# EAGLE board #2 v6 (EAGLE 9.7.0)
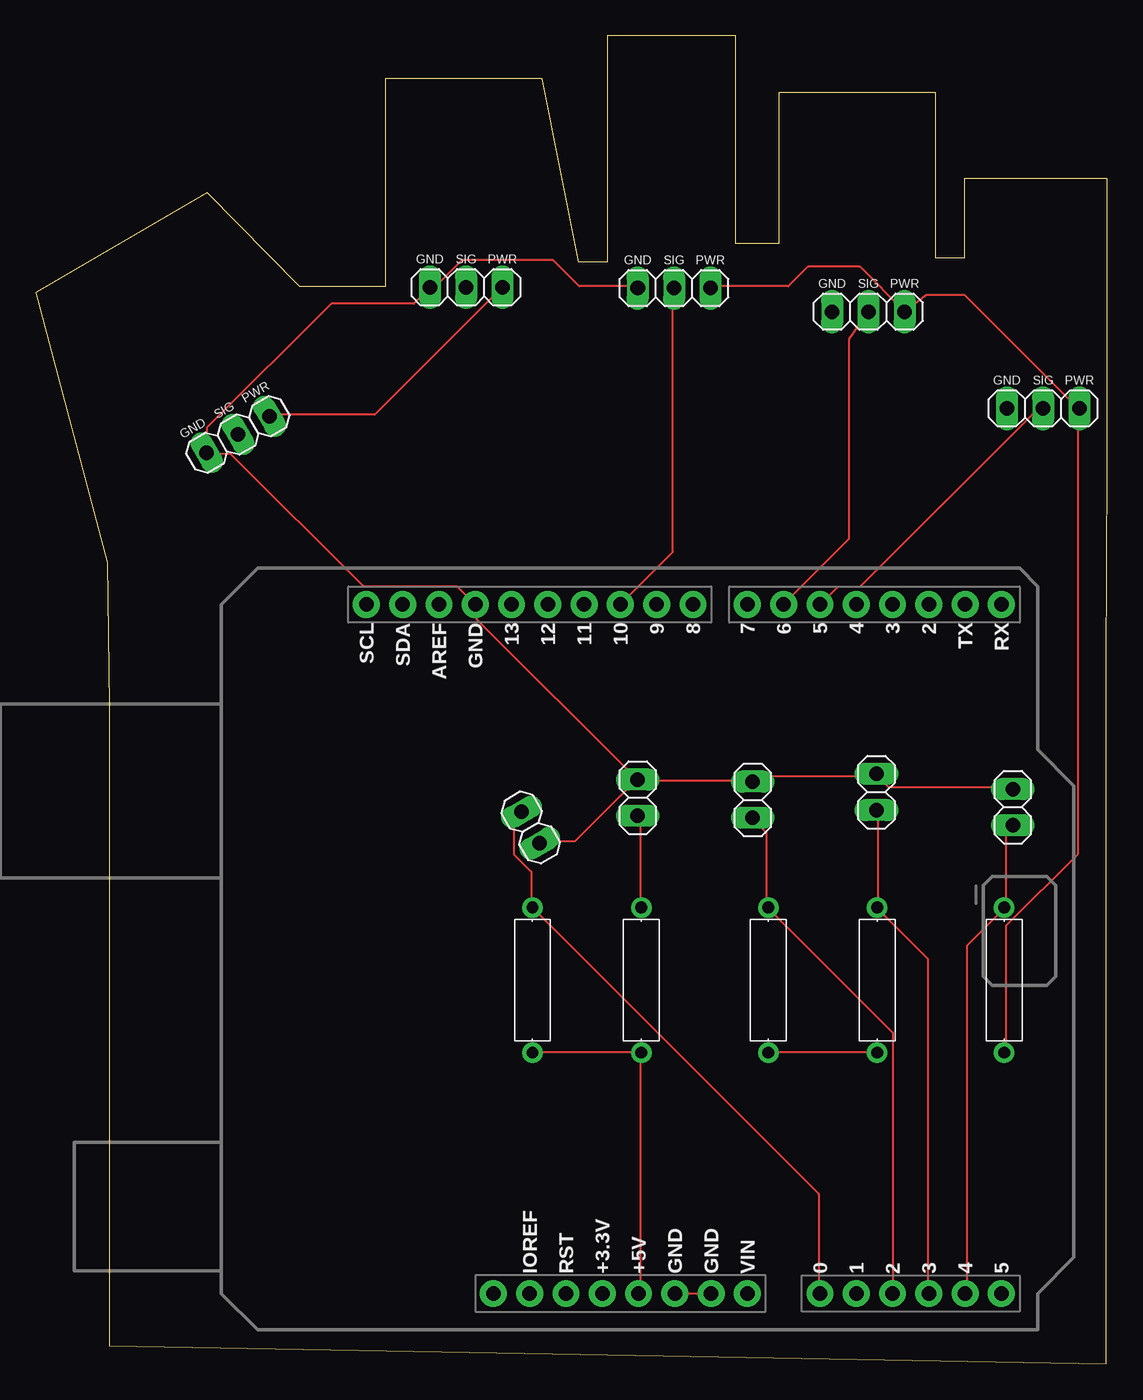
[diagram p0: board, top side]
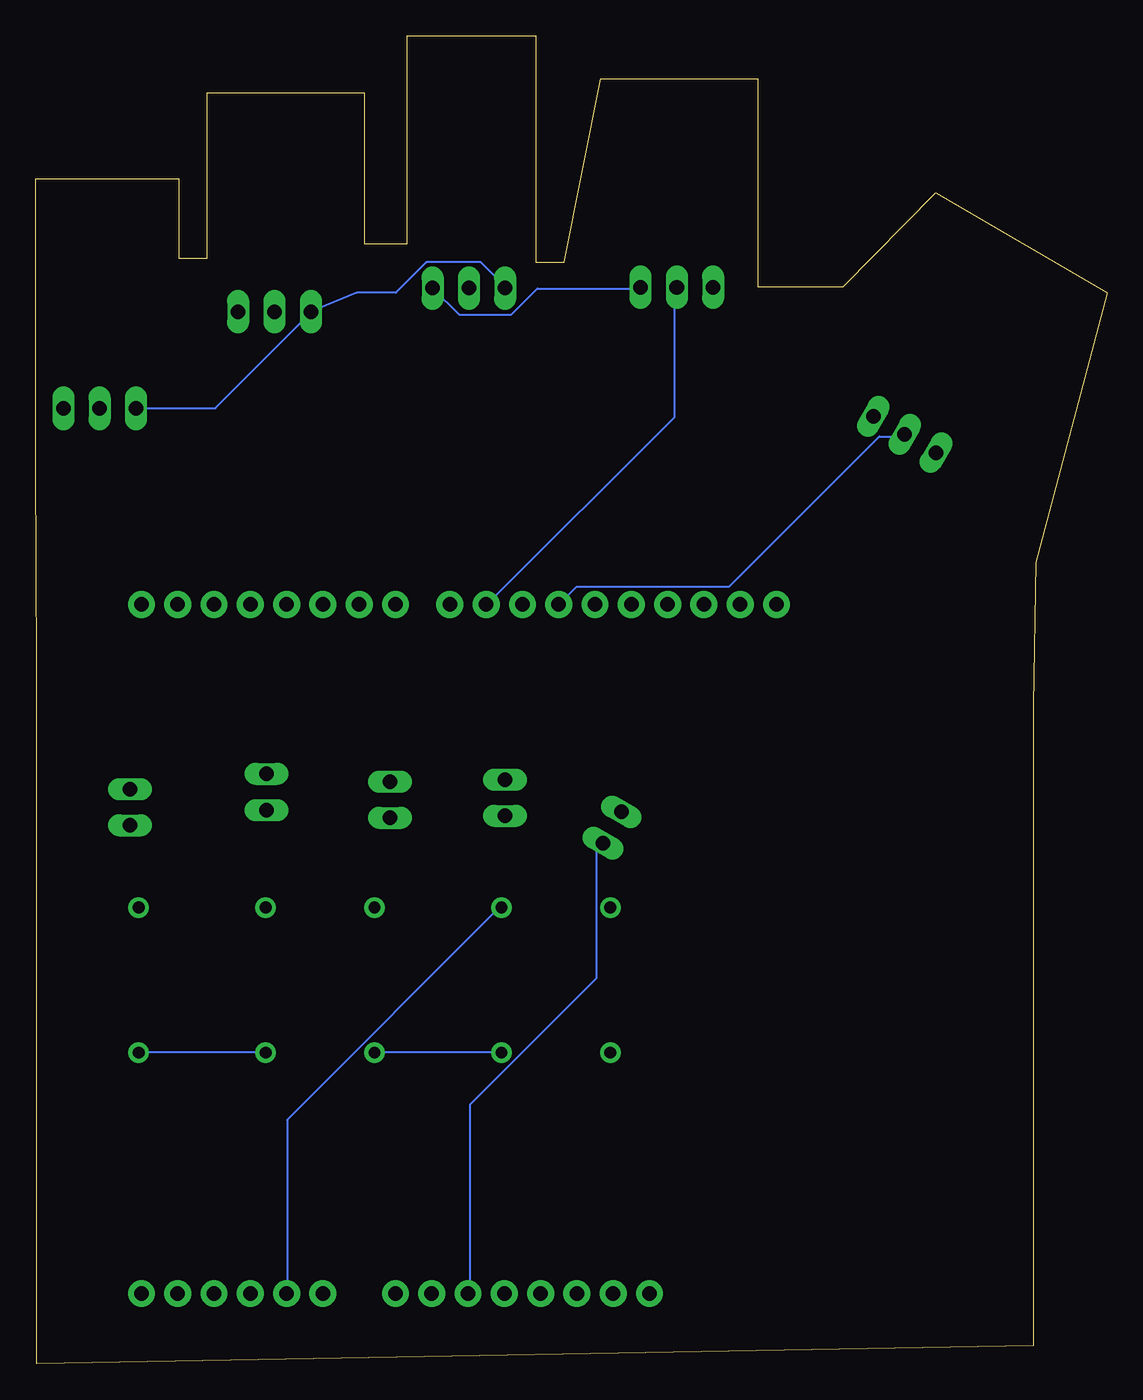
[diagram p1: board, bottom side, seen from below]

Size 75 x 93 mm. Coordinates in mm from the lower left corner, seen from the top.
Outline: 5.16,46.11 5.16,1.27 74.92,0 74.92,48.73 75,63 75,83 65,83 65,77.43 63,77.43 63,89 52,89 52,78.43 49,78.43 49,93 40,93 40,77.16 38,77.16 35.46,90 24.46,90 24.46,75.44 18.48,75.44 12,82 0,75 5,56.11 5.16,46.11
Copper layers (1*16): Top 0.035mm / dielectric 1.5mm / Bottom 0.035mm
Design rules "default": minimum track width 6mil, minimum drill 0.35mm, track to track 6mil, track to pad 6mil, pad to pad 6mil, via to via 6mil, smd to smd 6mil, copper to edge 40mil, drill to drill 6mil, minimum pad ring 10mil, minimum via ring 8mil, stop-mask expansion 4mil, vias tented up to drill 0mil, thermal gap 10mil

## Footprints (pad centres in the part's own frame; a part is rotated, then mirrored left to right if it is on the bottom)
1X02 = drill 1.016 long: 1 -1.27,0; 2 1.27,0
RESAD1016W63L850D250B = drill 0.83 pad 1.43: 1 -5.08,0; 2 5.08,0
SM-S2309S = drill 1.016 long: 1 -2.54,0; 2 0,0; 3 2.54,0
ARDUINO-UNO-R3-SHIELD = drill 1.016 pad 1.88: 3.3V 24.13,-2.54; 5V 24.13,0; A0 24.13,12.7; A1 24.13,15.24; A2 24.13,17.78; A3 24.13,20.32; A4 24.13,22.86; A5 24.13,25.4; AREF -24.13,-13.97; D2 -24.13,20.32; D3 -24.13,17.78; D4 -24.13,15.24; D5 -24.13,12.7; D6 -24.13,10.16; D7 -24.13,7.62; D8 -24.13,3.81; D9 -24.13,1.27; D10 -24.13,-1.27; D11 -24.13,-3.81; D12 -24.13,-6.35; D13 -24.13,-8.89; GND@0 24.13,2.54; GND@1 24.13,5.08; GND@2 -24.13,-11.43; IOREF 24.13,-7.62; NC 24.13,-10.16; RES 24.13,-5.08; RX -24.13,25.4; SCL -24.13,-19.05; SDA -24.13,-16.51; TX -24.13,22.86; VIN 24.13,7.62

## Placement (x,y rotation side)
R1  FLEX-SENSOR  [1X02]  42.14,39.65 90 top
R2  FLEX-SENSOR  [1X02]  50.19,39.49 90 top
R3  FLEX-SENSOR  [1X02]  58.85,40.04 90 top
R4  FLEX-SENSOR  [1X02]  68.4,38.98 90 top
R5  FLEX-SENSOR  [1X02]  34.64,37.54 300 top
R6  10k  [RESAD1016W63L850D250B]  34.77,26.87 90 top
R7  10k  [RESAD1016W63L850D250B]  42.39,26.87 90 top
R8  10k  [RESAD1016W63L850D250B]  51.28,26.87 90 top
R9  10k  [RESAD1016W63L850D250B]  58.9,26.87 90 top
R10  10k  [RESAD1016W63L850D250B]  67.79,26.87 90 top
SERVO1  SERVOSM-S2309S  [SM-S2309S]  70.52,66.9 180 top
SERVO2  SERVOSM-S2309S  [SM-S2309S]  58.29,73.67 180 top
SERVO3  SERVOSM-S2309S  [SM-S2309S]  30.13,75.38 180 top
SERVO4  SERVOSM-S2309S  [SM-S2309S]  44.68,75.32 180 top
SERVO5  SERVOSM-S2309S  [SM-S2309S]  14.17,65.08 210 top
U1  ARDUINO-UNO-R3-SHIELD  [ARDUINO-UNO-R3-SHIELD]  42.2,29.05 270 top

## Library data of the parts
R1-R10 SERVO1-SERVO5 U1 = Tinkercad

## Nets
U1_5V: R6.1 R7.1 R8.1 R9.1 R10.1 SERVO1.1 SERVO2.1 SERVO3.1 SERVO4.1 SERVO5.1 U1.5V
U1_A0: R5.1 R6.2 U1.A0
U1_A1: R1.1 R7.2 U1.A1
U1_A2: R2.1 R8.2 U1.A2
U1_A3: R3.1 R9.2 U1.A3
U1_A4: R4.1 R10.2 U1.A4
U1_D5: SERVO1.2 U1.D5
U1_D6: SERVO2.2 U1.D6
U1_D9: SERVO3.2 U1.D9
U1_D10: SERVO4.2 U1.D10
U1_D11: SERVO5.2 U1.D11
U1_GND: R1.2 R2.2 R3.2 R4.2 R5.2 SERVO1.3 SERVO2.3 SERVO3.3 SERVO4.3 SERVO5.3 U1.GND@0 U1.GND@1 U1.GND@2

## Tracks (layer width: path | path; a pad name or v marks a point on that pad's centre or on a via)
U1_5V
  Top 0.152: R8.1 51.31,21.81 58.77,21.81 R9.1 | R6.1 34.85,21.81 42.31,21.81 R7.1 42.31,21.65 42.31,5.04 U1.5V | SERVO5.1 16.41,66.46 23.72,66.46 32.56,75.3 SERVO3.1 | SERVO4.1 47.34,75.45 52.68,75.45 54.05,76.82 57.71,76.82 60.81,73.72 SERVO2.1 62.34,74.84 65.02,74.84 72.95,66.92 SERVO1.1 72.95,66.76 72.95,35.67 67.92,30.64 67.92,21.81 R10.1
  Bottom 0.152: R10.1 67.77,21.81 58.93,21.81 R9.1 | R8.1 51.15,21.81 42.47,21.81 R7.1 | SERVO3.1 32.71,75.3 39.88,75.3 41.71,73.47 45.36,73.47 47.19,75.3 SERVO4.1
U1_A0
  Top 0.152: R5.1 33.93,38.57 33.48,38.11 33.48,35.67 34.7,34.45 34.7,32.02 R6.2 34.85,31.86 54.81,11.9 54.81,5.04 U1.A0
U1_A1
  Top 0.152: R7.2 42.31,32.02 42.31,38.11 42.16,38.27 R1.1
  Bottom 0.152: U1.A1 57.4,5.04 57.4,17.08 42.47,32.02 R7.2
U1_A2
  Top 0.152: R2.1 50.24,38.11 51.15,37.2 51.15,32.02 R8.2 51.31,31.86 59.99,23.18 59.99,5.04 U1.A2
U1_A3
  Top 0.152: R3.1 58.93,38.72 58.93,32.02 R9.2 58.93,31.86 62.43,28.36 62.43,5.04 U1.A3
U1_A4
  Top 0.152: R4.1 68.38,37.66 67.92,37.2 67.92,32.02 R10.2 67.77,31.86 65.17,29.27 65.17,5.04 U1.A4
U1_D5
  Top 0.152: SERVO1.2 70.51,66.76 70.05,66.76 57.71,54.42 56.18,54.42 54.96,53.2 U1.D5
U1_D6
  Top 0.152: SERVO2.2 56.95,71.74 56.95,57.77 52.37,53.2 U1.D6
U1_D9
  Bottom 0.152: SERVO3.2 30.28,75.3 30.28,66.31 43.38,53.2 U1.D9
U1_D10
  Top 0.152: SERVO4.2 44.6,75.3 44.6,56.86 40.94,53.2 U1.D10
U1_D11
  Bottom 0.152: SERVO5.2 14.27,64.94 15.95,64.94 26.47,54.42 37.13,54.42 38.35,53.2 U1.D11
U1_GND
  Top 0.152: SERVO4.3 42.01,75.45 38.05,75.45 36.22,77.28 29.82,77.28 27.99,75.45 27.68,75.45 SERVO3.3 27.53,75.3 26.47,74.23 20.67,74.23 11.99,65.55 11.99,63.87 SERVO5.3 11.99,63.72 13.66,63.72 22.96,54.42 29.51,54.42 30.73,53.2 U1.GND@2 30.88,53.05 30.88,52.13 42.01,41.01 R1.2 | U1.GND@0 44.75,4.89 47.19,4.89 U1.GND@1 | R5.2 35.3,36.59 37.74,36.59 42.01,40.86 R1.2 | R1.2 42.16,40.86 50.09,40.86 R2.2 50.24,40.86 50.55,41.16 58.77,41.16 R3.2 58.93,41.16 59.69,40.4 68.38,40.4 R4.2
  Bottom 0.152: SERVO4.3 42.16,75.45 43.84,77.13 47.65,77.13 49.78,74.99 52.54,74.99 SERVO2.3 55.78,73.57 62.43,66.92 67.92,66.92 SERVO1.3 | U1.GND@0 44.6,5.04 44.6,18.15 35.76,26.99 35.76,35.98 35.3,36.44 R5.2